# Altium PCB PCB_Rpi4_New_Rev3.PcbDoc
Units mm, origin at the board's own origin, x right, y up, seen from the top; angles counter-clockwise.
Board outline 37.85 x 83.57 mm, 2 copper layers (Top Layer, Bottom Layer); 15 components, 17 nets, 85 pads, 17 vias.
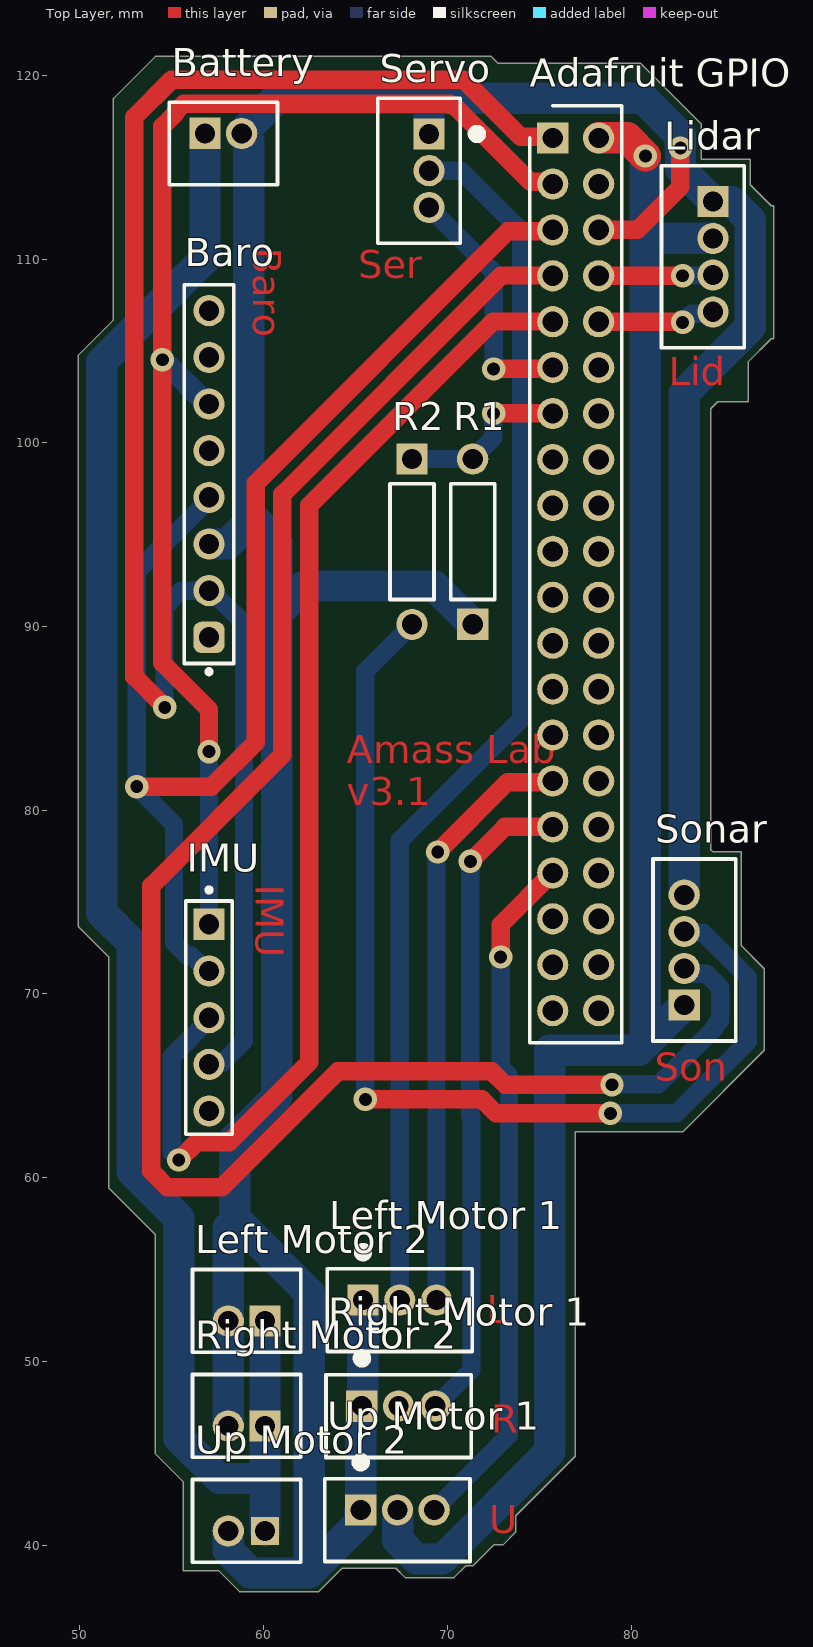
[diagram p0: Top Layer view]
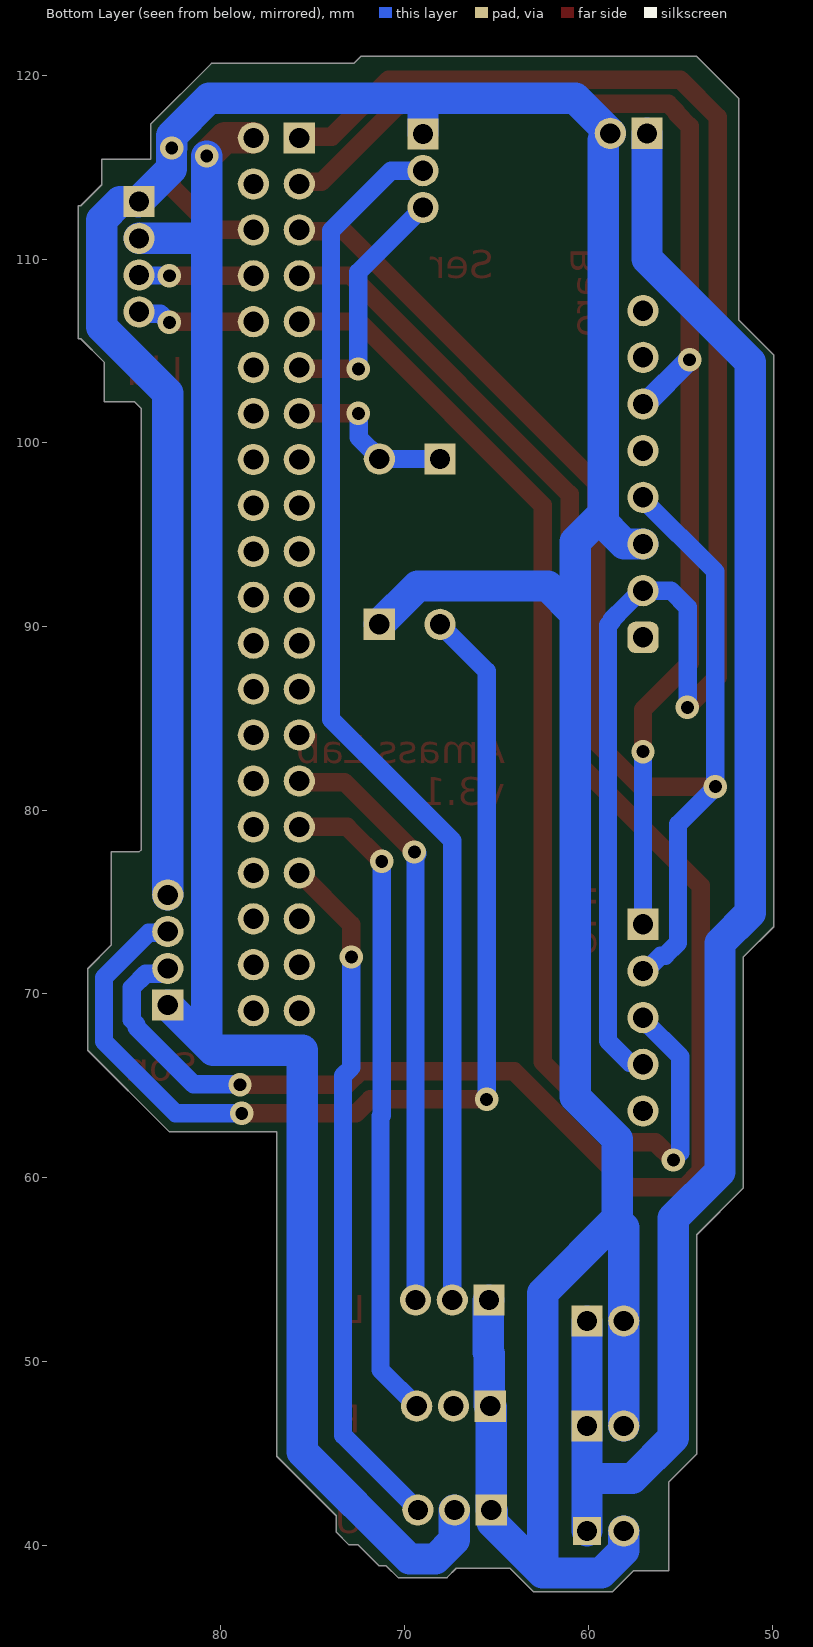
[diagram p1: Bottom Layer view, seen from below]

## Layer stack, top to bottom
Top Solder: solder mask 0.0102, Solder Resist, Dk 3.5
Top Layer: signal copper 0.0356
Dielectric 1: dielectric 0.32, FR-4, Dk 4.8
Bottom Layer: signal copper 0.0356
Bottom Solder: solder mask 0.0102, Solder Resist, Dk 3.5

## Board outline
87.249,66.929 87.249,71.374 85.979,72.644 85.979,77.724 84.455,77.724 84.328,77.851 84.328,101.854 84.709,102.235 86.36,102.235 86.36,104.394 87.63,105.664 87.757,105.664 87.757,112.903 87.63,112.903 86.487,114.046 86.487,115.443 83.82,115.443 83.82,117.348 80.518,120.65 72.771,120.65 72.39,121.031 54.102,121.031 51.816,118.745 51.816,106.68 49.911,104.775 49.911,73.66 51.562,72.009 51.562,59.436 54.102,56.896 54.102,44.958 55.626,43.434 55.626,38.608 57.531,38.608 58.674,37.465 62.992,37.465 64.262,38.735 67.183,38.735 67.691,38.227 70.358,38.227 70.993,38.862 71.374,38.862 72.517,40.005 73.025,40.005 73.724,40.703 73.724,41.593 76.962,44.831 76.962,62.484 82.804,62.484

## Design rules (kind name [scope] priority, off if disabled: settings)
Clearance [All] p1: gap=0.254 ignorepadtopadclearanceinfootprint=FALSE
PolygonConnect [All] p1: connectstyle=Relief reliefconductorwidth=0.254 reliefentries=4 polygonreliefangle="90 Angle" airgapwidth=0.254
RoutingVias [All] p1: holewidth=0.711 width=1.27 viastyle="Through Hole" minholewidth=0.711 minwidth=1.27 maxholewidth=0.711 maxwidth=1.27
SolderMaskExpansion [All] p1: expansion=0.102 istentingtop=FALSE
Width [All] p1: maxlimit=0.254 minlimit=0.254 preferedwidth=0.254
30 further rules are at their usual default settings.

## Components (designator, comment, footprint, x,y, rotation, side; value= is the part's Value field where it differs from the comment)
"Adafruit GPIO" "1979" RHDR40W60P250_2X20_5100X500X23 75.732,116.588 r270 top
Baro "61300811121" 61300811121 57.023,98.298 r90 top (schematic designator P?)
Battery "B2B-PH-K-S(LF)(SN)" JST-B2B-PH-K-S_V#1 57.801,116.29 r0 top
IMU "90120-0125" FP-90120-0125-MFG 57.023,68.707 r270 top (schematic designator J?)
"Left Motor 1" "B3B-PH-K-S(LF)(SN)" JST-B3B-PH-K-S-3_V 67.405,52.79 r0 top
"Left Motor 2" "B2B-PH-K-S(LF)(SN)" JST-B2B-PH-K-S_V#1 59.071,52.747 r180 top
Lidar "B4B-PH-K-S(LF)(SN)" JST-B4B-PH-K-S_V 83.905,110.125 r270 top
R1 "470" RESA60-630X240 71.374,94.615 r90 top
R2 "330" RESA60-630X240 68.072,94.615 r270 top
"Right Motor 1" "B3B-PH-K-S(LF)(SN)" JST-B3B-PH-K-S-3_V 67.342,47.012 r0 top
"Right Motor 2" "B2B-PH-K-S(LF)(SN)" JST-B2B-PH-K-S_V#1 59.071,47.032 r180 top
Servo "B3B-PH-K-S(LF)(SN)" JST-B3B-PH-K-S-3_V 68.453,114.808 r270 top
Sonar "B4B-PH-K-S(LF)(SN)" JST-B4B-PH-K-S_V 83.439,72.39 r90 top
"Up Motor 1" "B3B-PH-K-S(LF)(SN)" JST-B3B-PH-K-S-3_V 67.278,41.36 r0 top
"Up Motor 2" "B2B-PH-K-S(LF)(SN)" JST-B2B-PH-K-S_V#2 59.071,41.317 r180 top

## Footprints (in the part's own frame and the unit in brackets; to place one, negate y for a bottom-side part, rotate by r counter-clockwise, add the part's x,y. Pads: shape width x height; smd on the part's side, far side on the other; paste and mask are expansions set on the pad)
61300811121 [mm] "Pin Header, pitch 2.54 mm, THT, Vertical, single row, 8p"
  rrect50% 1.7x1.7 hole 1.1: 1(-8.89,0)
  round 1.7 hole 1.1: 2(-6.35,0) 3(-3.81,0) 4(-1.27,0) 5(1.27,0) 6(3.81,0) 7(6.35,0) 8(8.89,0)
  silkscreen extent -10.88,-1.35 10.31,1.35, body extent -10.16,-1.27 10.16,1.27, height 8.57
FP-90120-0125-MFG [mm]
  rect 1.7x1.7 hole 1.1 paste-2539.97 mask+0: 1(-5.08,0)
  round 1.7 hole 1.1 paste-2539.97 mask+0: 2(-2.54,0) 3(0,0) 4(2.54,0) 5(5.08,0)
  silkscreen extent -7.07,-1.27 6.35,1.27, body extent -6.45,-1.37 6.45,1.37, height 0.25
JST-B2B-PH-K-S_V#1 [mm] "Connector, 2-Leads, Body 5.9x4.5mm, Pitch 2mm"
  rect 1.7x1.7 hole 1.1: 1(-1,0.55)
  round 1.7 hole 1.1: 2(1,0.55)
  silkscreen extent -2.95,-2.25 2.95,2.25, body extent -2.95,-2.25 2.95,2.25, height 6
JST-B2B-PH-K-S_V#2 [mm] "Connector, 2-Leads, Body 5.9x4.5mm, Pitch 2mm"
  rect 1.5x1.5 hole 1.1: 1(-1,0.55)
  round 1.7 hole 1.1: 2(1,0.55)
  silkscreen extent -2.95,-2.25 2.95,2.25, body extent -2.95,-2.25 2.95,2.25, height 6
JST-B3B-PH-K-S-3_V [mm] "Connector, 3-Leads, Body 7.9x4.5mm, Pitch 2mm"
  rect 1.7x1.7 hole 1.1: 1(-2,0.55)
  round 1.7 hole 1.1: 2(0,0.55) 3(2,0.55)
  silkscreen extent -3.95,-2.25 3.95,3.4, body extent -3.95,-2.25 3.95,2.25, height 6
JST-B4B-PH-K-S_V [mm] "Connector, 4-Leads, Body 9.9x4.5mm, Pitch 2mm"
  rect 1.7x1.7 hole 1.1: 1(-3,0.55)
  round 1.7 hole 1.1: 2(-1,0.55) 3(1,0.55) 4(3,0.55)
  silkscreen extent -4.95,-2.25 4.95,2.25, body extent -4.95,-2.25 4.95,2.25, height 6
RESA60-630X240 [mm] "Axial Resistor, 2-Leads, Dia 2.4mm, Body Length 6.3mm"
  rect 1.7x1.7 hole 1.1: 1(-4.5,0)
  round 1.7 hole 1.1: 2(4.5,0)
  silkscreen extent -3.15,-1.2 3.15,1.2, body extent -3.15,-1.2 3.15,1.2, height 2.4
RHDR40W60P250_2X20_5100X500X23 [mm]
  rect 1.7x1.7 / inner round 1.7 / far side rect 1.7x1.7 hole 1.1: 1(0,0)
  round 1.7 hole 1.1: 2(0,2.5) 3(2.5,0) 4(2.5,2.5) 5(5,0) 6(5,2.5) 7(7.5,0) 8(7.5,2.5) 9(10,0) 10(10,2.5) 11(12.5,0) 12(12.5,2.5) 13(15,0) 14(15,2.5) 15(17.5,0) 16(17.5,2.5) 17(20,0) 18(20,2.5) 19(22.5,0) 20(22.5,2.5) 21(25,0) 22(25,2.5) 23(27.5,0) 24(27.5,2.5) 25(30,0) 26(30,2.5) 27(32.5,0) 28(32.5,2.5) 29(35,0) 30(35,2.5) 31(37.5,0) 32(37.5,2.5) 33(40,0) 34(40,2.5) 35(42.5,0) 36(42.5,2.5) 37(45,0) 38(45,2.5) 39(47.5,0) 40(47.5,2.5)
  silkscreen extent -1.75,-1.25 49.25,3.75

## Part data
"Adafruit GPIO": library part CMP-002-00071-1, "Stacking Header for Pi A+/B+/Pi 2/Pi 3 - 2x20 Extra Tall Header", Case/Package=None, Check_prices=https://www.snapeda.com/parts/1979/Adafruit+Industries+LLC/view-part/?ref=eda, Component Type=Standard, Design Item ID=1979, MF="Adafruit Industries", MP=1979, Pins=40, SnapEDA_Link=https://www.snapeda.com/parts/1979/Adafruit+Industries+LLC/view-part/?ref=snap, Source=1979.SchLib
Baro: library part CMP-1502-01076-3, Color=Black, Contact Resistance=20mΩ, Current Rating=3A, Max Operating Temperature=105°C, Min Operating Temperature=-40°C, Operating Supply Voltage=250V, Connector Type="Male Pin", Contact Material=Copper, Contact Mating Length=5.9944mm, Contact Plating=Gold, Gender=Male, Height=8.54mm, Lead Pitch=2.54mm, Mount="Through Hole", NexarPartId=32855533, Number of Contacts=8, Number of Pins=8, Number of Positions=8, Number of Rows=1, Orientation=Vertical, Packaging=Bulk, Pitch=2.54mm, REACH SVHC=Unknown, RoHS=Compliant, Termination=Solder, Voltage Rating=250V
Battery "Left Motor 2" "Right Motor 2" "Up Motor 2": library part CMP-2000-05162-1, "Male Header, Pitch 2 mm, 1 x 2 Position, Height 6 mm, Tail Length 3.4 mm, -25 to 85 degC, RoHS, Bulk", Manufacturer=JST, Datasheet URL=http://datasheet.octopart.com/B2B-PH-K-S%28LF%29%28SN%29-JST-datasheet-8324864.pdf, Datasheet Version=Nov-08, Manufacturer URL=http://www.jst.com/home2.html, No of Positions=2, Pitch=2mm, Style/Orientation=StraightHeader/Plug, Termination=Crimp, Type=ShroudedHeader
IMU: library part CMP-00257-00655425-1, "90120-0125 2.54mm Pitch C-Grid III Header, Single Row, Vertical, 5 Circuits, Tin (Sn) Plating", Contact Resistance=20mΩ, Current Rating=3A, Housing Color=Black, Manufacturer Lifecycle Status=ACTIVE, Max Operating Temperature=125°C, Max Voltage Rating (DC)=350.35kV, Min Operating Temperature=-55°C, Voltage Rating=350V, Contact Gender=Male, Contact Material=Brass, Contact Plating=Tin, Country of Origin=SK, Gender=Male, Glow Wire Compliant=Non-compliant, Housing Material=Polyester, Lead Free="Lead Free", Lead Length=2.9mm, Lead Pitch=2.54mm, Lifecycle Status=Production, Mating Post Length=6.75mm, Mount="Through Hole", NexarPartId=655425, Number of Circuits=5, Number of Contacts=5, Number of Pins=5, Number of Positions=5, Number of Rows=1, Orientation=Vertical, Packaging=Bulk, Pitch=2.54mm, Plating=Tin, Radiation Hardening=No, REACH SVHC="No SVHC", RoHS=Compliant, Schedule B=8536694040, Termination=Solder, Voltage Rating (AC)=350V
"Left Motor 1" "Right Motor 1" Servo "Up Motor 1": library part CMP-2000-05164-1, "Male Header, Pitch 2 mm, 1 x 3 Position, Height 6 mm, Tail Length 3.4 mm, -25 to 85 degC, RoHS, Bulk", Manufacturer=JST, Datasheet URL=https://datasheet.ciiva.com/11746/0900766b80826550-11746939.pdf, Datasheet Version=Oct-06, Manufacturer URL=http://www.jst.com/home2.html, No of Positions=3, Pitch=2mm, Style/Orientation=StraightHeader/Plug, Termination=Crimp, Type=ShroudedHeader
Lidar Sonar: library part CMP-2000-05165-1, "Male Header, Pitch 2 mm, 1 x 4 Position, Height 6 mm, Tail Length 3.4 mm, -25 to 85 degC, RoHS, Bulk", Manufacturer=JST, Datasheet URL=http://datasheet.octopart.com/B4B-PH-K-S%28LF%29%28SN%29-JST-datasheet-10558886.pdf, Datasheet Version=Apr-09, Manufacturer URL=http://www.jst.com/home2.html, No of Positions=4, Pitch=2mm, Style/Orientation=StraightHeader/Plug, Termination=Crimp, Type=ShroudedHeader
R1 R2: library part CMP-1659-00073-1, "Axial Resistor, 100 KOhm, +/- 1%, 0.25 W, -55 to 155 degC, 2-Pin THD, RoHS, Bulk", Case\Package=Axial, Max Operating Temperature="155 degC", Min Operating Temperature="-55 degC", Package Quantity=200, Power Rating="250 mW", Resistance="475 Ohm", Tolerance=1%, Voltage Rating="250 V", ComponentLink1Description="Manufacturer URL", ComponentLink1URL=http://www.yageo.com/, ComponentLink2Description=Datasheet, ComponentLink2URL=http://www.yageo.com/documents/recent/Yageo%20LR_MFR_2013.pdf, DatasheetVersion=Apr-13, Length="0.248 inch", Mount="Through Hole", PackageDescription="2-Pin Axial Lead, Dia 2.4 mm, Body Length 6.3 mm", PackageReference=MFR-25, Packaging=Bulk, RoHSCompliant=true

## Via types
v1: diameter 1.27, hole 0.7, Top Layer to Bottom Layer, 17 vias

## Nets (pads, with @x,y where several pads share a name; then routed paths per layer and width w, separated by ;. In a path a pad name is that pad's centre, name@x,y a point inside that pad or via, vN(x,y) a via of type N, cw(c..) or ccw(c..) an arc to the next point about the centre after c; other vN are vias at no path point)
"NetAdafruit GPIO_1": "Adafruit GPIO.1" Baro.2 IMU.4 | length 93.8
  Top Layer w1: v1@54.61,85.617 52.959,87.268 52.959,117.729 54.991,119.761 70.866,119.761 73.975,116.652 75.668,116.652 75.732,116.588
  Top Layer w1.2: v1(54.61,85.598) v1@54.61,85.617
  Bottom Layer w1: v1@54.597,85.611 54.597,88.03 54.588,88.039 54.588,91.037 55.499,91.948 Baro.2 ; IMU.4 57.119,66.263 57.754,66.263 58.928,67.437 58.928,90.076 58.727,90.277 58.727,90.363 57.978,91.112 57.976,91.112 Baro.2@57.14,91.948
  Bottom Layer w1.2: v1@54.597,85.611 v1(54.61,85.598) ; Baro.2 Baro.2@57.14,91.948
"NetAdafruit GPIO_2": "Adafruit GPIO.2" "Up Motor 1.2" Lidar.2 Sonar.1 | length 98.5
  Top Layer w1.7: 78.232,116.6 79.782,116.6 v1(80.772,115.61)
  Bottom Layer w0.254: 80.428,111.924 80.772,112.268 ; 80.772,111.252 80.899,111.125
  Bottom Layer w1.2: 67.278,41.91 67.297,41.891
  Bottom Layer w1.7: 67.297,41.891 67.297,40.272 68.32,39.249 69.729,39.249 75.565,45.085 75.565,66.929 80.428,66.929 Sonar.1 ; 80.772,67.273 80.772,111.252 80.772,112.268 v1(80.772,115.61) ; 80.899,111.125 Lidar.2
"NetAdafruit GPIO_3": "Adafruit GPIO.3" Baro.6 IMU.1 | length 71.5
  Top Layer w1: v1(57.023,83.185) 57.023,85.471 54.483,88.011 v1(54.483,104.521) 54.483,117.221 55.197,117.935 55.197,118.002 55.639,118.444 70.133,118.444 70.213,118.364 70.355,118.364 74.52,114.199 75.633,114.199 75.66,114.172
  Bottom Layer w1: IMU.1 v1(57.023,83.185)
  Bottom Layer w1.2: v1(54.483,104.521) 54.502,104.521 56.915,102.108 Baro.6
"NetAdafruit GPIO_5": "Adafruit GPIO.5" Baro.4 IMU.2 | length 72.8
  Top Layer w1: v1(53.086,81.28) 57.15,81.28 59.563,83.693 59.563,97.79 73.277,111.504 75.636,111.504
  Top Layer w1.2: IMU.2@56.956,71.314 IMU.2 ; 75.636,111.504 75.732,111.6
  Bottom Layer w1: IMU.2@56.888,71.247 56.052,72.083 55.819,72.083 55.118,72.784 55.118,79.229 53.086,81.261 53.086,92.983 Baro.4@57.023,96.92
  Bottom Layer w1.2: IMU.2@56.888,71.247 IMU.2 ; Baro.4@57.023,96.92 Baro.4
"NetAdafruit GPIO_6": "Adafruit GPIO.6" "Left Motor 1.1" "Left Motor 2.2" "Right Motor 1.1" "Right Motor 2.2" "Up Motor 1.1" "Up Motor 2.2" Baro.3 Battery.2 Lidar.1 R1.1 Servo.1 Sonar.4 | length 210.7
  Top Layer w1: 78.232,111.588 80.346,111.588 82.677,113.919 v1@82.677,116.026
  Bottom Layer w1.2: Battery.2 Battery.2@58.817,116.824 ; 65.228,41.86 65.278,41.91 ; 65.278,47.498 65.341,47.561 ; v1(82.677,116.045) v1@82.69,116.032 ; 82.889,78.063 83.058,78.232
  Bottom Layer w1.7: Baro.3 58.039,94.488 59.436,95.885 60.706,94.615 60.706,90.697 ; 58.071,40.767 58.071,39.706 59.296,38.481 62.484,38.481 ; 58.071,46.482 58.071,52.197 58.071,57.284 ; 58.42,57.284 58.42,62.103 60.706,64.389 60.706,90.697 ; 58.42,57.785 62.484,53.721 62.484,38.481 ; Battery.2 60.706,118.745 69.003,118.745 ; Battery.2@58.817,116.824 59.182,116.459 59.182,95.631 ; 65.228,41.86 65.228,41.225 62.484,38.481 ; 65.278,41.91 65.278,47.498 ; 65.341,47.561 65.388,47.608 65.388,50.419 65.451,50.483 65.451,53.294 65.405,53.34 ; Servo.1 69.003,118.745 ; R1.1 69.287,92.202 62.211,92.202 60.706,90.697 ; v1(82.677,116.045) 82.677,116.713 80.645,118.745 69.003,118.745 ; v1@82.69,116.032 82.69,114.916 Lidar.1@84.497,113.109 ; Sonar.4 82.889,78.063 82.889,102.701 86.487,106.299 86.487,112.129 85.491,113.125 Lidar.1
"NetAdafruit GPIO_7": "Adafruit GPIO.7" Sonar.2 | length 99.4
  Top Layer w1: 75.732,109.1 72.929,109.1 61.017,97.188 61.017,83.017 53.883,75.883 53.883,60.343 54.755,59.471 57.717,59.471 64.032,65.786 72.414,65.786 73.141,65.059 v1(78.959,65.059)
  Bottom Layer w1: v1@78.972,65.072 81.479,65.072 84.593,68.186 84.593,68.337 84.847,68.591 84.847,70.34 84.093,71.094 83.32,71.094 Sonar.2@83.024,71.39
  Bottom Layer w1.2: v1(78.959,65.059) v1@78.972,65.072 ; Sonar.2 Sonar.2@83.024,71.39
"NetAdafruit GPIO_8": "Adafruit GPIO.8" Lidar.3 | length 6.2
  Top Layer w1: 78.242,109.09 v1@82.801,109.09
  Top Layer w1.2: v1@82.801,109.09 v1(82.804,109.093)
  Bottom Layer w1: v1@82.817,109.106 Lidar.3@84.484,109.106
  Bottom Layer w1.2: v1(82.804,109.093) v1@82.817,109.106
"NetAdafruit GPIO_9": "Adafruit GPIO.9" IMU.3 | length 65.8
  Top Layer w1: v1@55.391,60.96 56.354,61.923 58.113,61.923 62.484,66.294 62.484,96.598 72.486,106.6 75.732,106.6
  Top Layer w1.2: v1(55.372,60.96) v1@55.391,60.96
  Bottom Layer w1: v1@55.372,60.979 54.991,61.36 54.991,66.58 IMU.3@57.023,68.612
  Bottom Layer w1.2: v1(55.372,60.96) v1@55.372,60.979 ; IMU.3@57.023,68.612 IMU.3
"NetAdafruit GPIO_10": "Adafruit GPIO.10" Lidar.4 | length 6.5
  Top Layer w1: 78.244,106.588 v1@82.75,106.588
  Top Layer w1.2: v1@82.75,106.588 82.785,106.553 v1(82.804,106.553)
  Bottom Layer w1: v1@82.823,106.553 83.299,107.029 Lidar.4@84.385,107.029
  Bottom Layer w1.2: v1(82.804,106.553) v1@82.823,106.553 ; Lidar.4@84.385,107.029 Lidar.4@84.481,107.125
"NetAdafruit GPIO_11": "Adafruit GPIO.11" Servo.3 | length 13.5
  Top Layer w1: v1@72.532,104.028 75.66,104.028
  Top Layer w1.2: v1(72.517,104.013) v1@72.532,104.028 ; 75.66,104.028 75.732,104.1
  Bottom Layer w1: Servo.3 72.517,109.294 v1(72.517,104.013)
"NetAdafruit GPIO_13": "Adafruit GPIO.13" R1.2 R2.1 | length 9.5
  Top Layer w1: v1(72.517,101.6) 75.732,101.6
  Bottom Layer w1: R2.1 R1.2 ; R1.2@71.374,99.156 72.504,100.285 v1@72.504,101.587
  Bottom Layer w1.2: R1.2 R1.2@71.374,99.156 ; v1@72.504,101.587 v1(72.517,101.6)
"NetAdafruit GPIO_29": "Adafruit GPIO.29" "Left Motor 1.3" | length 32.3
  Top Layer w1: v1(69.469,77.724) 73.273,81.528 75.66,81.528
  Top Layer w1.2: 75.66,81.528 75.732,81.6
  Bottom Layer w1: 69.405,53.34 v1@69.405,77.641
  Bottom Layer w1.2: v1@69.405,77.641 69.469,77.705 v1(69.469,77.724)
"NetAdafruit GPIO_31": "Adafruit GPIO.31" "Right Motor 1.3" | length 35.8
  Top Layer w1: v1(71.247,77.216) 73.126,79.095 75.727,79.095
  Top Layer w1.2: 75.727,79.095 75.732,79.1
  Bottom Layer w1: 69.342,47.561 71.313,49.533 71.313,63.332 71.247,63.398 v1(71.247,77.216)
"NetAdafruit GPIO_33": "Adafruit GPIO.33" "Up Motor 1.3" | length 37.7
  Top Layer w1: v1@72.911,72.022 72.911,73.779 75.732,76.6
  Top Layer w1.2: v1(72.898,72.009) v1@72.911,72.022
  Bottom Layer w1: 69.278,41.91 73.349,45.981 73.349,65.547 72.898,65.998 v1(72.898,72.009)
NetBattery_1: "Left Motor 2.1" "Right Motor 2.1" "Up Motor 2.1" Battery.1 | length 92.1
  Bottom Layer w1.7: Battery.1 56.801,110.014 51.181,104.394 51.181,74.422 52.832,72.771 52.832,60.325 55.372,57.785 55.372,45.847 57.594,43.624 60.071,43.624 ; 60.071,40.767 60.071,43.624 ; 60.071,52.197 60.071,46.482 60.071,43.624
"NetLeft Motor 1_2": "Left Motor 1.2" Servo.2 | length 67.3
  Bottom Layer w1: 67.405,53.34 67.405,78.349 74.006,84.95 74.006,111.541 70.739,114.808 Servo.2
NetR2_2: R2.2 Sonar.3 | length 57.7
  Top Layer w1: v1(65.532,64.262) 71.882,64.262 72.644,63.5 v1(78.867,63.5)
  Bottom Layer w1: v1(65.532,64.262) 65.532,87.575 R2.2 ; v1(78.867,63.5) 82.447,63.5 86.36,67.413 86.36,70.89 83.918,73.333 Sonar.3@82.946,73.333
  Bottom Layer w1.2: Sonar.3 Sonar.3@82.946,73.333
pads on no net: "Adafruit GPIO.4" "Adafruit GPIO.12" "Adafruit GPIO.14" "Adafruit GPIO.15" "Adafruit GPIO.16" "Adafruit GPIO.17" "Adafruit GPIO.18" "Adafruit GPIO.19" "Adafruit GPIO.20" "Adafruit GPIO.21" "Adafruit GPIO.22" "Adafruit GPIO.23" "Adafruit GPIO.24" "Adafruit GPIO.25" "Adafruit GPIO.26" "Adafruit GPIO.27" "Adafruit GPIO.28" "Adafruit GPIO.30" "Adafruit GPIO.32" "Adafruit GPIO.34" "Adafruit GPIO.35" "Adafruit GPIO.36" "Adafruit GPIO.37" "Adafruit GPIO.38" "Adafruit GPIO.39" "Adafruit GPIO.40" "Right Motor 1.2" Baro.1 Baro.5 Baro.7 Baro.8 IMU.5
copper on no net: | length 0.1
  Top Layer w1.2: 75.66,69.172 75.732,69.1

## Other copper
Top Layer:
  text "Baro" at 59.436,110.617 h1.52 r270
  text "Ser" at 65.151,108.966 h1.52
  text "Lid" at 82.042,103.124 h1.52
  text "Amass Lab" at 64.516,82.55 h1.52
  text "v3.1" at 64.516,80.264 h1.52
  text "IMU" at 59.563,75.946 h1.52 r270
  text "Son" at 81.28,65.278 h1.52
  text "L" at 72.136,52.07 h1.52
  text "R" at 72.39,46.101 h1.52
  text "U" at 72.263,40.64 h1.52